# Altium PCB PIR Sensor driver v5.1-Cheburan.PcbDoc
Units mm, origin at the board's own origin, x right, y up, seen from the top; angles counter-clockwise.
Board outline 43.5 x 31 mm, 2 copper layers (Top Layer, Bottom Layer); 19 components, 12 nets, 49 pads, 0 vias.
Unrouted connection lines stored in the file: 1.
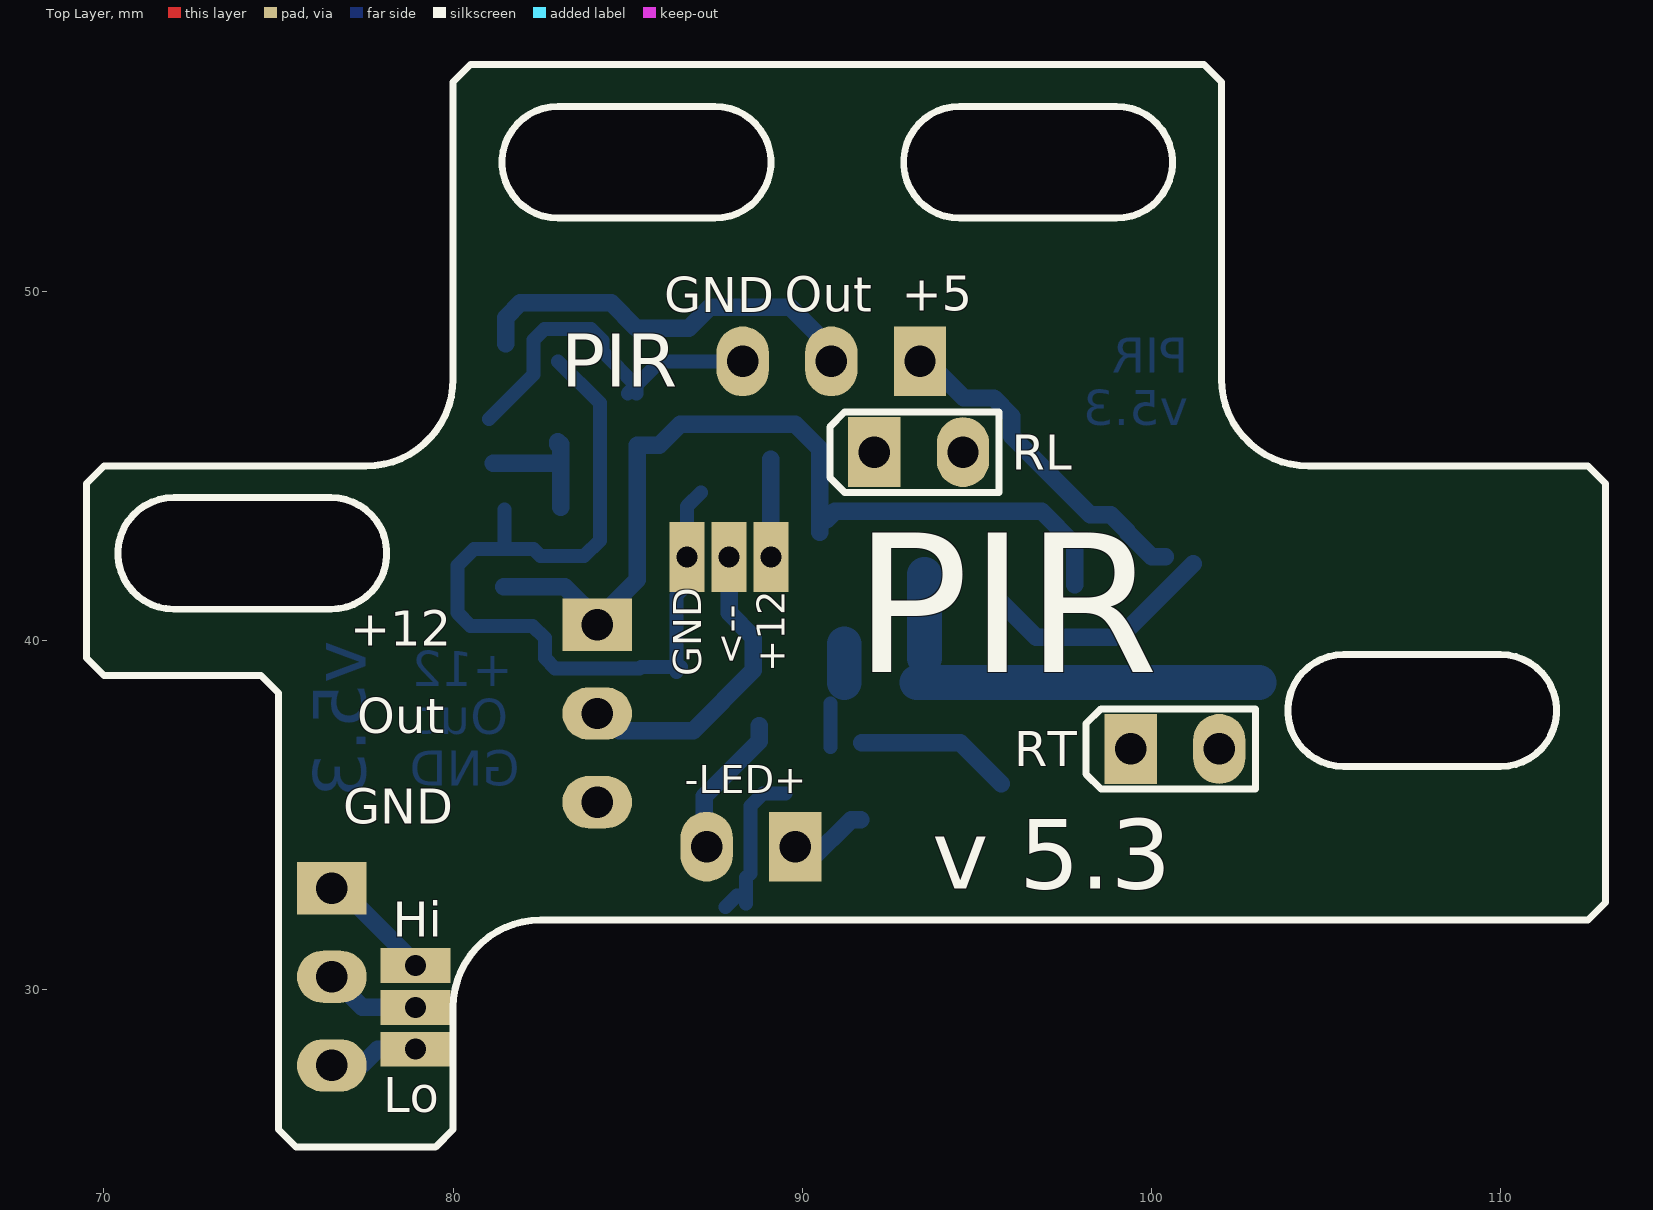
[diagram p0: Top Layer view]
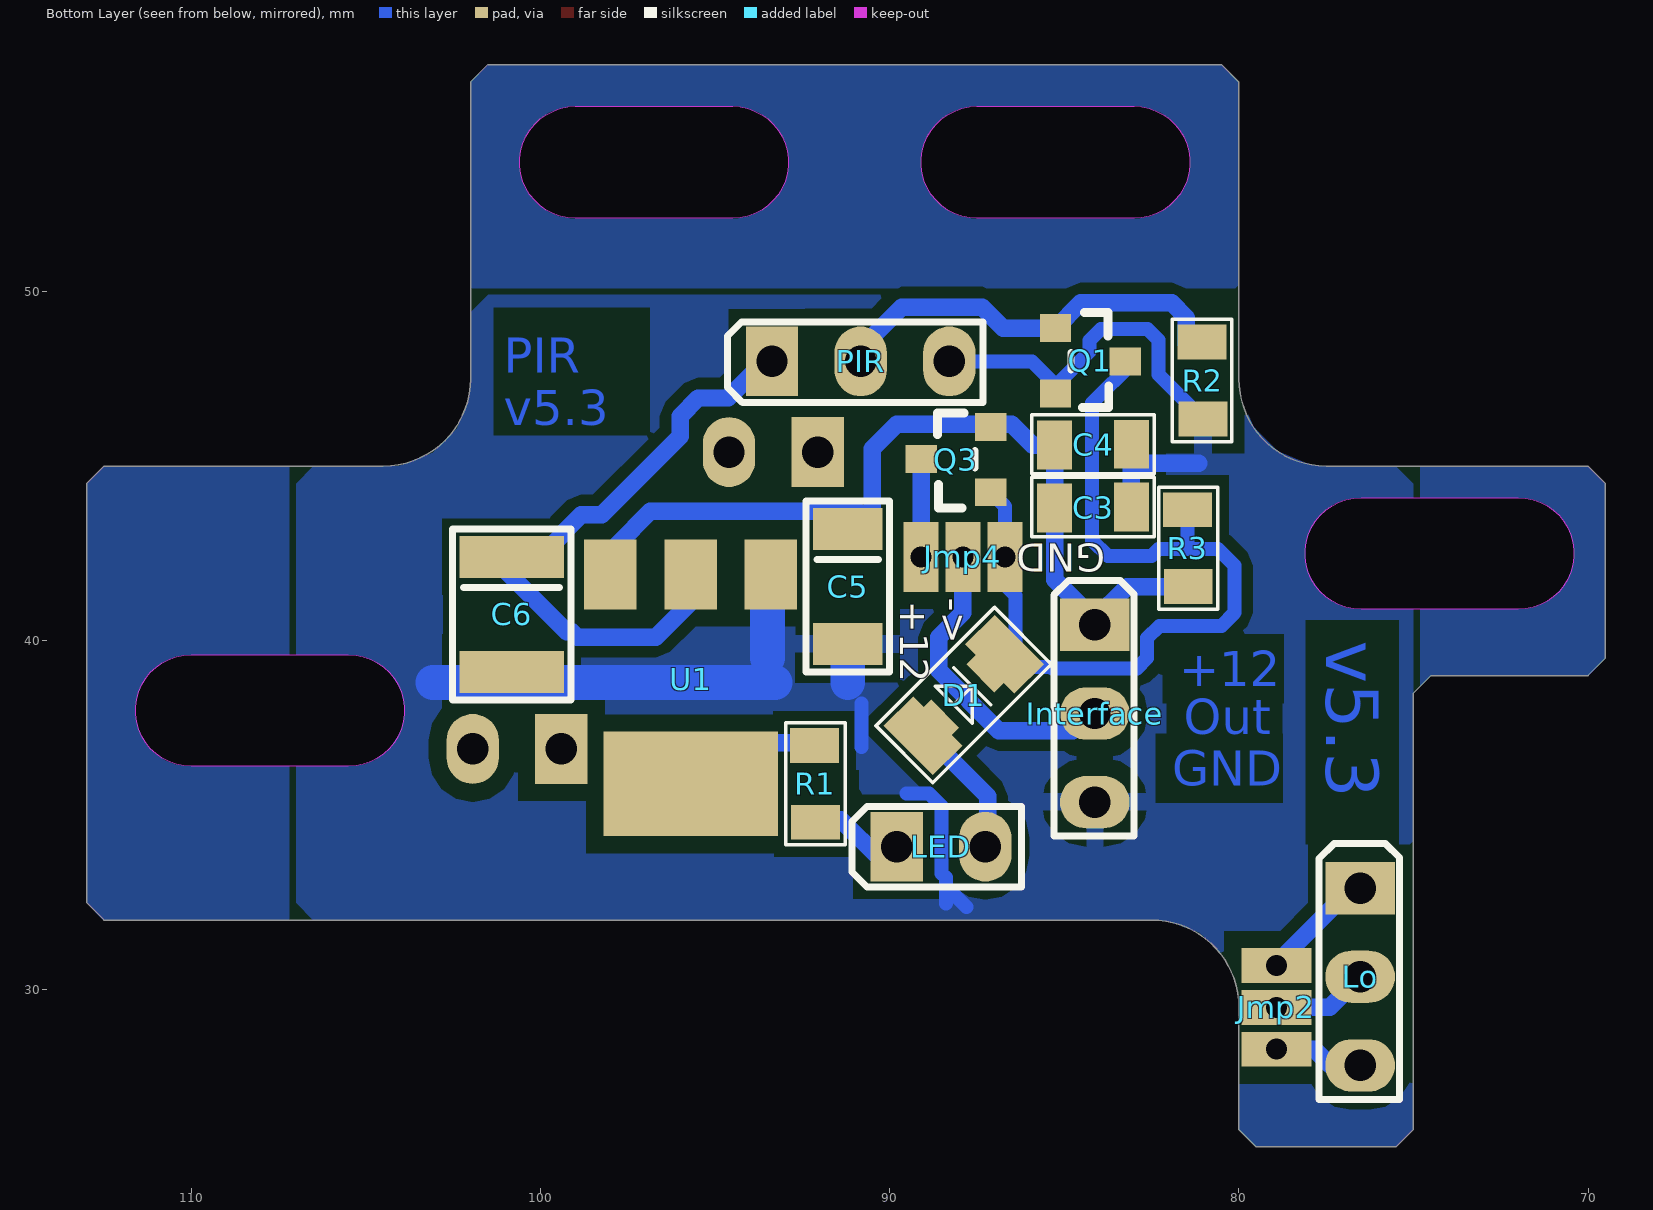
[diagram p1: Bottom Layer view, seen from below]
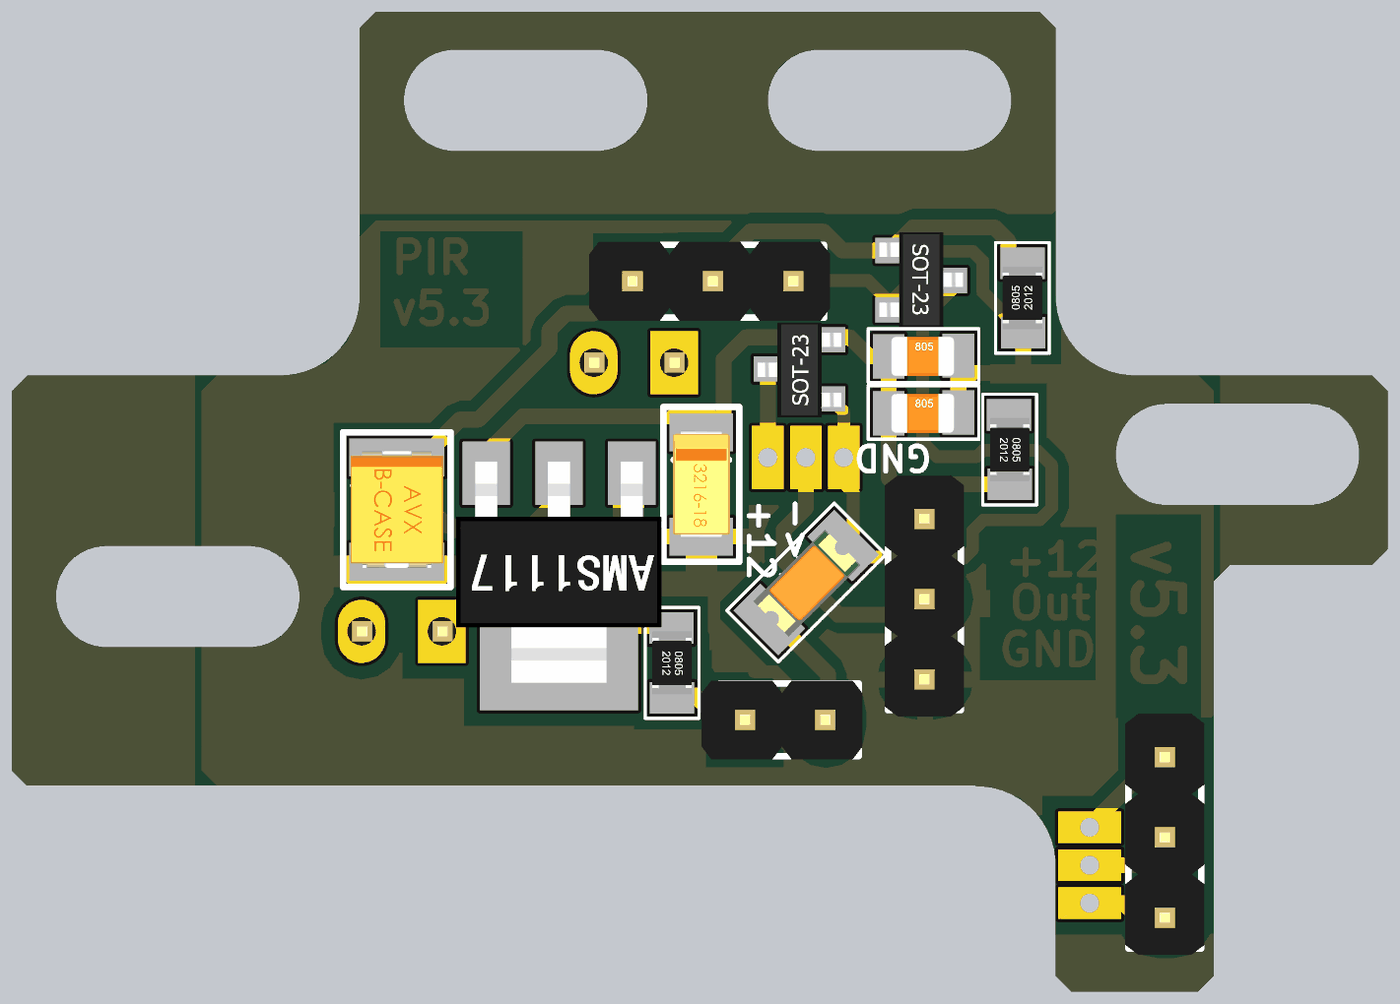
[diagram p2: 3D render of the assembled board from below, using the file's embedded part models]

## Layer stack, top to bottom
Top Solder: solder mask 0.0102, Solder Resist, Dk 3.5
Top Layer: signal copper 0.0356
Dielectric 1: dielectric 0.32, FR-4, Dk 4.8
Bottom Layer: signal copper 0.0356
Bottom Solder: solder mask 0.0102, Solder Resist, Dk 3.5

## Board outline
75,26 75,38.5 74.5,39 70,39 69.5,39.5 69.5,44.5 70,45 77.5,45 ccw(c77.5,47.5) 80,47.5 80,56 80.5,56.5 101.5,56.5 102,56 102,47.5 ccw(c104.5,47.5) 104.5,45 112.5,45 113,44.5 113,32.5 112.5,32 82.5,32 ccw(c82.5,29.5) 80,29.5 80,26 79.5,25.5 75.5,25.5
cut-out: 83,52.1 87.5,52.1 ccw(c87.5,53.7) 87.5,55.3 83,55.3 ccw(c83,53.7)
cut-out: 94.5,52.1 99,52.1 ccw(c99,53.7) 99,55.3 94.5,55.3 ccw(c94.5,53.7)
cut-out: 105.5,36.4 110,36.4 ccw(c110,38) 110,39.6 105.5,39.6 ccw(c105.5,38)
cut-out: 72,40.9 76.5,40.9 ccw(c76.5,42.5) 76.5,44.1 72,44.1 ccw(c72,42.5)

## Design rules (kind name [scope] priority, off if disabled: settings)
Clearance "Poly To All" [InPolygon vs (InPadClass('All Pads'))] p1: gap=0.5 ignorepadtopadclearanceinfootprint=FALSE except(0: Arc-Hole Track-Hole SMDPad-Hole THPad-Hole Via-Hole Fill-Hole Poly-Hole Region-Hole Text-Hole)
Clearance Jumpers [InComponent('Jmp*') vs InComponent('Jmp*')] p2: gap=0.2 ignorepadtopadclearanceinfootprint=FALSE except(0: Arc-Hole Track-Hole SMDPad-Hole THPad-Hole Via-Hole Fill-Hole Poly-Hole Region-Hole Text-Hole)
Clearance "Poly to cutout" [InPolygon vs IsRegion] p3: gap=0 ignorepadtopadclearanceinfootprint=FALSE
Clearance [All] p4: gap=0.3 ignorepadtopadclearanceinfootprint=FALSE except(0: Arc-Hole Track-Hole SMDPad-Hole THPad-Hole Via-Hole Fill-Hole Poly-Hole Region-Hole Text-Hole)
ComponentClearance [All] p1: gap=0.01 collisioncheckmode=3 verticalgap=0.2 showdistances=FALSE
Height [All] p1: minheight=0 maxheight=25 prefheight=12.7
HoleSize [All] p1: absolutevalues=TRUE maxlimit=3.2 minlimit=0.4 maxpercent=80.000 minpercent=20.000
HoleToHoleClearance [All] p1: gap=0.2 allowstackedmicrovias=TRUE
PlaneClearance [All] p1: clearance=0.5
PlaneConnect [All] p1: planeconnectstyle=Relief reliefexpansion=0.508 reliefentries=4 reliefconductorwidth=0.5 reliefairgap=0.5
PolygonConnect [All] p1: connectstyle=Relief reliefconductorwidth=0.5 reliefentries=4 polygonreliefangle="90 Angle" airgapwidth=0.5
RoutingVias [All] p1: holewidth=0.7 width=1.5 viastyle="Through Hole" minholewidth=0.4 minwidth=0.4 maxholewidth=3.2 maxwidth=7
SilkToSilkClearance [All] p1: silktosilkclearance=0.05
SilkToSolderMaskClearance [IsPad] p1: minsilkscreentomaskgap=0.2 clearancetoexposedcopper=TRUE
SolderMaskExpansion [All] p1: expansion=0.1
Width [All] p1: maxlimit=3 minlimit=0.2 preferedwidth=0.5
22 further rules are at their usual default settings.

## Components (designator, comment, footprint, x,y, rotation, side; value= is the part's Value field where it differs from the comment)
C3 "0.1uF" "SMD 0805 (2012)" 85.2,43.8 r180 bottom
C4 "0.01uF" "SMD 0805 (2012)" 85.2,45.6 r180 bottom
C5 "10uF" "SMD 1206 Tantal (3216)" 91.2,43.2 r270 bottom
C6 "22uF" "SMD 3528 Tantal (1210)" 100.825,42.4 r270 bottom
D1 "Orange" "LED SMD 1206-0805 Orange" 89.048,37.277 r135 bottom
Interface "Interface" "Line 2.54 X 3" 84.125,40.455 r180 bottom
Jmp2 "Jumper_3pos" "Jumper 3pos ws Holes" 78.925,30.7 r270 bottom
Jmp4 "Jumper_3pos" "Jumper 3pos ws Holes" 89.1,42.4 r180 bottom
LED "IR LED (AlarmIndicator)" "Line 2.54 x 2" 89.8,34.1 r90 bottom
Lo "HiLo Switch" "Line 2.54 X 3" 76.525,32.915 r180 bottom (schematic designator "Lo Hi")
PIR "PIR Sensor" "Line 2.54 X 3" 93.37,48 r90 bottom
Q1 "BSS138" SOT-23 85.25,48.95 r270 bottom
Q3 "BSS84" SOT-23 87.1,44.25 r90 bottom
R1 "1kOm" "SMD 0805 (2012)" 92.15,36.925 r270 bottom
R2 "10kOm" "SMD 0805 (2012)" 81.025,46.425 r90 bottom
R3 "10kOm" "SMD 0805 (2012)" 81.475,43.675 r270 bottom
RL "RL" "Line 2.54 x 2" 92.06,45.4 r90 top
RT "RT" "Line 2.54 x 2" 99.4,36.9 r90 top
U1 "AMS1117 - 5V" "SOT-223-3 (AMS)" 95.7,34.9 r0 bottom

## Footprints (in the part's own frame and the unit in brackets; to place one, negate y for a bottom-side part, rotate by r counter-clockwise, add the part's x,y. Pads: shape width x height; smd on the part's side, far side on the other; paste and mask are expansions set on the pad)
"Jumper 3pos ws Holes" [mm]
  rect 1x2 hole 0.6: 1(0,0) 2(1.2,0) 3(2.4,0)
"LED SMD 1206-0805 Orange" [mm]
  rect 1.2x2 smd: A(0,0) K(3.3,0)
  rect 1x1.143 smd: A(0.4,0) K(2.825,0)
  silkscreen extent -0.75,-1.15 4.05,1.15, body extent 0.04,-0.82 3.26,0.78, height 1.1
"Line 2.54 x 2" [mm]
  rect 2x1.5 hole 0.9: 1(0,0)
  oval 2x1.5 hole 0.9: 2(0,-2.54)
  silkscreen extent -1.15,-3.57 1.15,1.28, body extent -1.25,-3.69 1.25,1.39, height 8.3
"Line 2.54 X 3" [mm]
  rect 2x1.5 hole 0.9: 1(0,0)
  oval 2x1.5 hole 0.9: 2(0,-2.54) 3(0,-5.08)
  silkscreen extent -1.17,-6.05 1.12,1.27, body extent -1.27,-6.25 1.22,1.37, height 8.2
"SMD 0805 (2012)" [mm]
  rect 1x1.4 smd: 1(-0.075,0) 2(2.125,0.025)
  silkscreen extent -0.72,-0.82 2.78,0.87, body extent 0,-0.62 2,0.63, height 0.78
"SMD 1206 Tantal (3216)" [mm]
  rect 1.2x2 smd: GND(3.3,0) VCC(0,0)
  silkscreen extent -0.8,-1.2 4.1,1.2, body extent -0.05,-0.9 3.35,0.9, height 1.8
"SMD 3528 Tantal (1210)" [mm]
  rect 1.2x3 smd: GND(3.3,0) VCC(0,0)
  silkscreen extent -0.8,-1.7 4.1,1.7, body extent -0.2,-1.46 3.5,1.47, height 2.03
SOT-23 [mm]
  rect 0.8x0.9 smd: 1(0,0) 2(1.875,0) 3(0.95,2)
  silkscreen extent -0.45,0.45 2.27,1.53, body extent -0.57,-0.32 2.43,2.32, height 1.08
"SOT-223-3 (AMS)" [mm]
  rect 1.5x2 smd: 1(-2.3,-7) 2(0,-7) 3(2.3,-7)
  rect 5x3 smd: 2(0,-1)
  body extent -3.25,-7.37 3.25,-0.38, height 1.85

## Part data
C3 C4: library part "Cap SMD 0402-1812", "Capacitor"
C5 C6: library part "Cap Tantal", "Capacitor"
D1: library part "Led SMD Orange", "?2v ?20mA", Forward Voltage Min=?, Forward Voltage TYP=?2, Resistor for 5v VCC="330 Om", Color=Orange, Forward Amp (mA)=?, Liminous Min (mcd)=?, Liminous Typ (mcd)=?, Wave len min/typ=?
Interface Lo PIR: library part PLS-3, "Vert, Sgl line, Male"
LED RL RT: library part PLS-2, "Vert, Sgl line, Male"
Q1: "N-Channel 50V - 0.7-1? - 0.22A", I d - Drain current (continuous) at TC = 25°C="0.22 A", I d - Drain current (continuous) at TC = 100°C="50 A", Datasheet=http://tec.org.ru/board/0-0-0-511-20, Monufacturer=Farchild, Name=BSS138, RDS=<6Om, V DSS (v)=60
Q3: "P-Channel -50V - 10-1? - 0.13A", I d - Drain current (continuous) at TC = 25°C="0.13 A", Open Voltage="-0.8...-2.0 V", Datasheet=http://tec.org.ru/board/0-0-0-515-20, Monufacturer=Farchild, Name=BSS84, RDS=<10Om, V DSS (v)=60
R1 R2 R3: library part "Res All Types"
U1: library part AMS1117_FIX, "Voltage Regulator SOT-223-3", Capacitors="In: 10mF; Out: 22mF", Case=SOT-223, Max Voltage In (V)=15, Dropuot=1-1.3V, Dtatsheet=https://lib.chipdip.ru/029/DOC001029248.pdf, I output (A)=1, Name="AMS1117 1.5 / 1.8 / 2.5 / 2.85 / 3.3 / 5.0", t=-40...+125°C, V Out="1.5 / 1.8 / 2.5 / 2.85 / 3.3 / 5.0"

## Nets (pads, with @x,y where several pads share a name; then routed paths per layer and width w, separated by ;. In a path a pad name is that pad's centre, name@x,y a point inside that pad or via, vN(x,y) a via of type N, cw(c..) or ccw(c..) an arc to the next point about the centre after c; other vN are vias at no path point)
+5V: C6.VCC PIR.1 R1.1 U1.2 | length 21.6
  Bottom Layer w0.5: R1.1@91.7,37.075 94.525,37.075 U1.2@95.7,35.9 ; PIR.1 93.575,48 94.625,46.95 95.478,46.95 96,46.428 96,45.85 98.25,43.6 98.828,43.6 99.3,43.128 99.3,43.1 100,42.4 C6.VCC@100.4,42.4 ; U1.2@95.6,41.7 95.6,41.2 96.7,40.1 98.947,40.1 99.097,40.25 99.25,40.25 C6.VCC@101.2,42.2
+12V: C3.1 C4.1 C5.VCC Interface.1 Q3.2 R3.2 U1.3 | length 25.6
  Bottom Layer w0.5: R3.2 83.2,41.55 84.125,40.625 Interface.1@84.125,40.6 ; Interface.1 Interface.1@84.125,40.6 ; C5.VCC@90.5,43.1 90.5,45.5 89.8,46.2 86.5,46.2 85.9,45.6 C4.1 C3.1 85.275,41.75 Interface.1@84.125,40.6 ; C5.VCC@90.7,43.468 90.816,43.584 90.932,43.7 96.85,43.7 97.8,42.75 U1.3@97.8,41.6
"ALARM OUT": Interface.2 Jmp4.2 | length 9.3
  Bottom Layer w0.5: Interface.2@84.125,38.06 84.76,37.425 86.875,37.425 88.6,39.15 88.6,40.1 87.9,40.8 Jmp4.2@87.9,41.8 ; Jmp4.2@87.75,41.65 Jmp4.2@87.9,41.8 ; Jmp4.2 Jmp4.2@87.9,41.8 ; Jmp4.2@88,41.9 Jmp4.2@87.9,41.8
GND: C3.2 C4.2 C5.GND C6.GND Interface.3 PIR.3 Q1.2 R2.1 U1.1 | length 33.5
  Bottom Layer w0.4: R2.1 82.3,47.625 82.3,48.607 82.618,48.925 83.95,48.925 84.275,48.6 84.275,48.275 Q1.2@85.238,47.313 ; Q1.2@85,47.075 Q1.2@85.238,47.313 ; Q1.2 85.25,47.3 Q1.2@85.238,47.313 ; 87.8,32.375 88.125,32.7 ; PIR.3 85.925,48 Q1.2@85.238,47.313 ; 88.39,32.475 88.39,33.212 88.51,33.332 88.51,35.267 88.868,35.625 89.525,35.625 ; 90.8,36.95 90.8,38.2
  Bottom Layer w0.5: 81.15,45.075 C4.2@83.075,45.075 ; C4.2@83,45.625 83,45.7 C4.2 C4.2@83.075,45.075 ; C3.2 C4.2@83.075,45.075
  Bottom Layer w1: 91.2,38.8 C5.GND ; 93.275,38.8 103.075,38.8 ; 93.5,39.5 U1.1@93.5,41.9
NetD1_A: D1.A LED.2 | length 4.1
  Bottom Layer w0.5: LED.2@87.125,34.1 87.193,34.168 87.193,35.542 88.765,37.115 D1.A@88.765,37.56
NetJmp2_1: Jmp2.1 Lo.1 | length 2.5
  Bottom Layer w0.5: Lo.1@77.068,32.607 78.6,31.075 Jmp2.1@78.6,30.7
NetJmp2_2: Jmp2.2 Lo.2 | length 2.4
  Bottom Layer w0.5: Lo.2 77.4,29.5 Jmp2.2@78.6,29.5
NetJmp2_3: Jmp2.3 Lo.3 | length 2.3
  Bottom Layer w0.5: Lo.3 77.375,27.835 77.84,28.3 Jmp2.3@78.6,28.3
NetJmp4_1: Jmp4.1 Q3.3 | length 2.8
  Bottom Layer w0.5: Jmp4.1 Q3.3
NetLED_1: LED.1 R1.2 | length 2.5
  Bottom Layer w0.5: LED.1@89.64,33.736 90.261,33.736 91.4,34.875 R1.2@91.675,34.875
"SENSOR OUT": PIR.2 Q1.1 R2.2 | length 11.9
  Bottom Layer w0.5: R2.2@81.5,48.5 81.5,49.25 81.925,49.675 84.525,49.675 Q1.1 86.75,48.95 87.35,49.55 89.65,49.55 90.83,48.37 PIR.2 PIR.2@90.83,47.73
toGnd: D1.K Jmp4.3 Q1.3 Q3.1 R3.1 | length 25.6
  Bottom Layer w0.4: R3.1 81.475,42.675 81.425,42.625 ; Q1.3@83,48 84.2,46.8 84.2,42.875 83.75,42.425 82.5,42.425 82.3,42.625 81.425,42.625 ; D1.K@86.4,39.1 D1.K@86.4,39.25 ; D1.K@86.525,39.25 D1.K@86.4,39.25 ; Jmp4.3@86.6,42.5 86.6,41.5 86.4,41.3 D1.K@86.4,39.25 ; Jmp4.3 86.7,43.85 Q3.1 ; 81.425,42.625 80.6,42.625 80.125,42.15 80.125,40.8 80.5,40.425 82.275,40.425 82.625,40.075 82.625,39.498 82.918,39.205 85.332,39.205 85.377,39.25 D1.K@86.4,39.25
pads on no net: RL.1 RL.2 RT.1 RT.2

## Polygon pours and split planes (outlines as drawn)
GND on Bottom Layer "Bottom Layer-No Net" (solid, pour order 0): 74.5,39 75,38.5 75,26 75.5,25.5 79.5,25.5 80,26 80,29.6 cw(c82.402,29.6) 82.5,32 112.5,32 113,32.5 113,42 113,44.5 112.5,45 104.5,45 cw(c104.395,47.395) 102,47.5 102,56 101.5,56.5 80.5,56.5 80,56 80,47.5 cw(c77.5,47.5) 77.5,45 70,45 69.5,44.5 69.5,39.5 70,39

## Other copper
Top Layer:
  text ".Layer_Name" at 98.175,58.475 h1
Bottom Layer:
  pour cut-out: 82.075,44.425 82.075,42.975 82.725,43 82.75,42.975 83,43.225 83,44.35
  pour cut-out: 75.5,45 75,44.5 75,38.5 74.8,38.7 74.8,45
  pour cut-out: 102,49.4 101.5,49.9 80.5,49.9 80,49.4 80,50.1 102,50.1
  pour cut-out: 107,44.5 107,32.5 106.5,32 107.2,32 107.2,45 106.5,45
  pour cut-out: 85.925,47.075 86.8,46.2 87.9,45 87.9,43 89.6,41.3 96.2,41.3 101.725,41.3 101.725,43 97.25,43 96.95,44.775 92.414,49.514 87.05,49.55 86.45,48.95 85,48.95 80.5,48.95 80.5,47.075
  pour cut-out: 102.8,39.539 102.8,41.55 102.775,41.575 102.65,41.45 99.625,41.45 99.625,39.35 100.125,38.85 101.725,38.85
  pour cut-out: 90.875,36.3 90.875,35.742 90.825,35.692 90.967,35.55 92.825,35.55 92.825,36.425
  text ".Layer_Name" at 82.2,59.2 h1
  text "PIR / v5.3" at 101.05,46.175 h1
  text "v5.3" at 77.5,40 h1.5 r90
  text "+12" at 81.7,38.7 h1
  text "Out" at 81.575,37.325 h1
  text "GND" at 81.9,35.85 h1

## Silkscreen, mask and mechanical layers (free items; w line width, h text height)
Top Overlay:
  lines w0.2: 69.5,39.5 70,39 74.5,39 75,38.5 75,26 75.5,25.5 79.5,25.5 80,26 80,29.5 cw(c82.5,29.5) 82.5,32 112.5,32 113,32.5 113,44.5 112.5,45 104.5,45 cw(c104.5,47.5) 102,47.5 102,56 101.5,56.5 80.5,56.5 80,56 80,47.5 cw(c77.5,47.5) 77.5,45 70,45 69.5,44.5 69.5,39.5 ; 72,40.9 cw(c72,42.5) 72,44.1 76.5,44.1 cw(c76.5,42.5) 76.5,40.9 72,40.9 ; 83,52.1 cw(c83,53.7) 83,55.3 87.5,55.3 cw(c87.5,53.7) 87.5,52.1 83,52.1 ; 94.5,52.1 cw(c94.5,53.7) 94.5,55.3 99,55.3 cw(c99,53.7) 99,52.1 94.5,52.1 ; 105.5,36.4 cw(c105.5,38) 105.5,39.6 110,39.6 cw(c110,38) 110,36.4 105.5,36.4
  text ".Layer_Name" at 98.175,58.475 h1
  text "+5" at 92.85,49.45 h1
  text "Out" at 89.5,49.425 h1
  text "GND" at 86.05,49.4 h1
  text "PIR" at 83.1,47.275 h1.52
  text "-->" at 88.325,41.025 h0.8 r90
  text "+12" at 77.05,39.85 h1
  text "+12" at 89.5,39.1 h0.8 r90
  text "PIR" at 91.475,39.1 h4
  text "GND" at 87.1,38.975 h0.8 r90
  text "Out" at 77.25,37.35 h1
  text "-LED+" at 86.631,35.625 h0.8
  text "GND" at 76.85,34.75 h1
  text "v 5.3" at 93.725,32.9 h2
  text "Hi" at 78.275,31.525 h1
Bottom Overlay:
  text ".Layer_Name" at 82.2,59.2 h1
  text "GND" at 83.825,42.775 h0.8 r180
  text "->" at 88.55,41.225 h0.8 r90
  text "+12" at 89.7,41.15 h0.8 r90
Top Solder:
  text ".Layer_Name" at 98.175,58.475 h1
Bottom Solder:
  text ".Layer_Name" at 82.2,59.2 h1
Mechanical 2:
  text "32.5-43 x 24.5-31 mm" at 70.4,61.25 h1
  text "V 5.3" at 91.4,59.8 h2
  text "PIR HC-SR501" at 70.375,59.475 h1
  text ".Pcb_File_Name_No_Path" at 70.325,57.425 h1
Mechanical 3:
  text "32.5-43 x 24.5-31 mm" at 113,61.25 h1
  text "V 5.3" at 92.1,59.8 h2
  text "PIR HC-SR501" at 112.975,59.475 h1
  text ".Pcb_File_Name_No_Path" at 112.925,57.425 h1
Drill Drawing:
  text ".Legend" at 70.4,63.4 h1

## Dimensions
107.5,29.5 to 113,29.5 on Mechanical 3
70,25.5 to 75,26 on Mechanical 3
70,25.5 to 75,25 on Mechanical 2
107.5,29.5 to 113,29.5 on Mechanical 2
75,56.5 to 75,50 on Mechanical 2
70,25 to 113,27.5 on Mechanical 3
75,56.5 to 70,25.5 on Mechanical 3
75,56.5 to 70,25.5 on Mechanical 2
70,25 to 113,27.5 on Mechanical 2